# Altium PCB MotherBoard.PcbDoc
Units mil, origin at the board's own origin, x right, y up, seen from the top; angles counter-clockwise.
Board outline 6770.74 x 6458.91 mil, 2 copper layers (Top Layer, Bottom Layer); 79 components, 106 nets, 563 pads, 0 vias.
Unrouted connection lines stored in the file: 301.
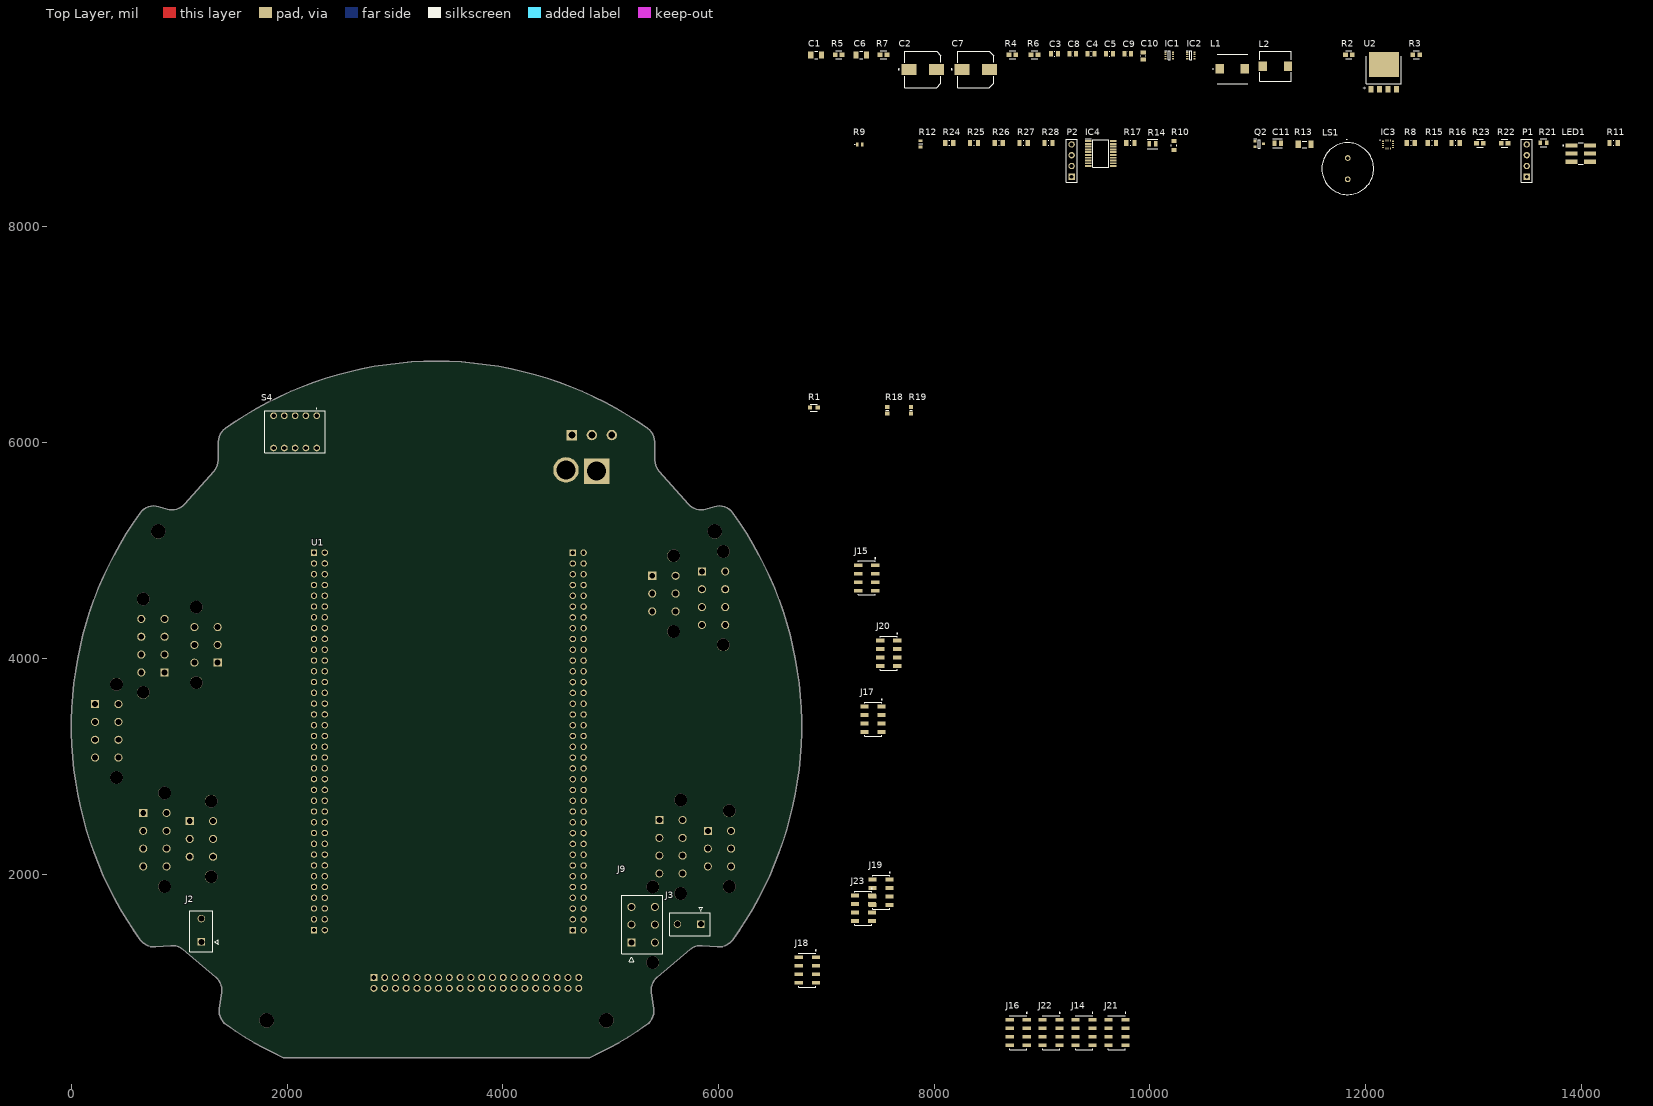
[diagram p0: Top Layer view]
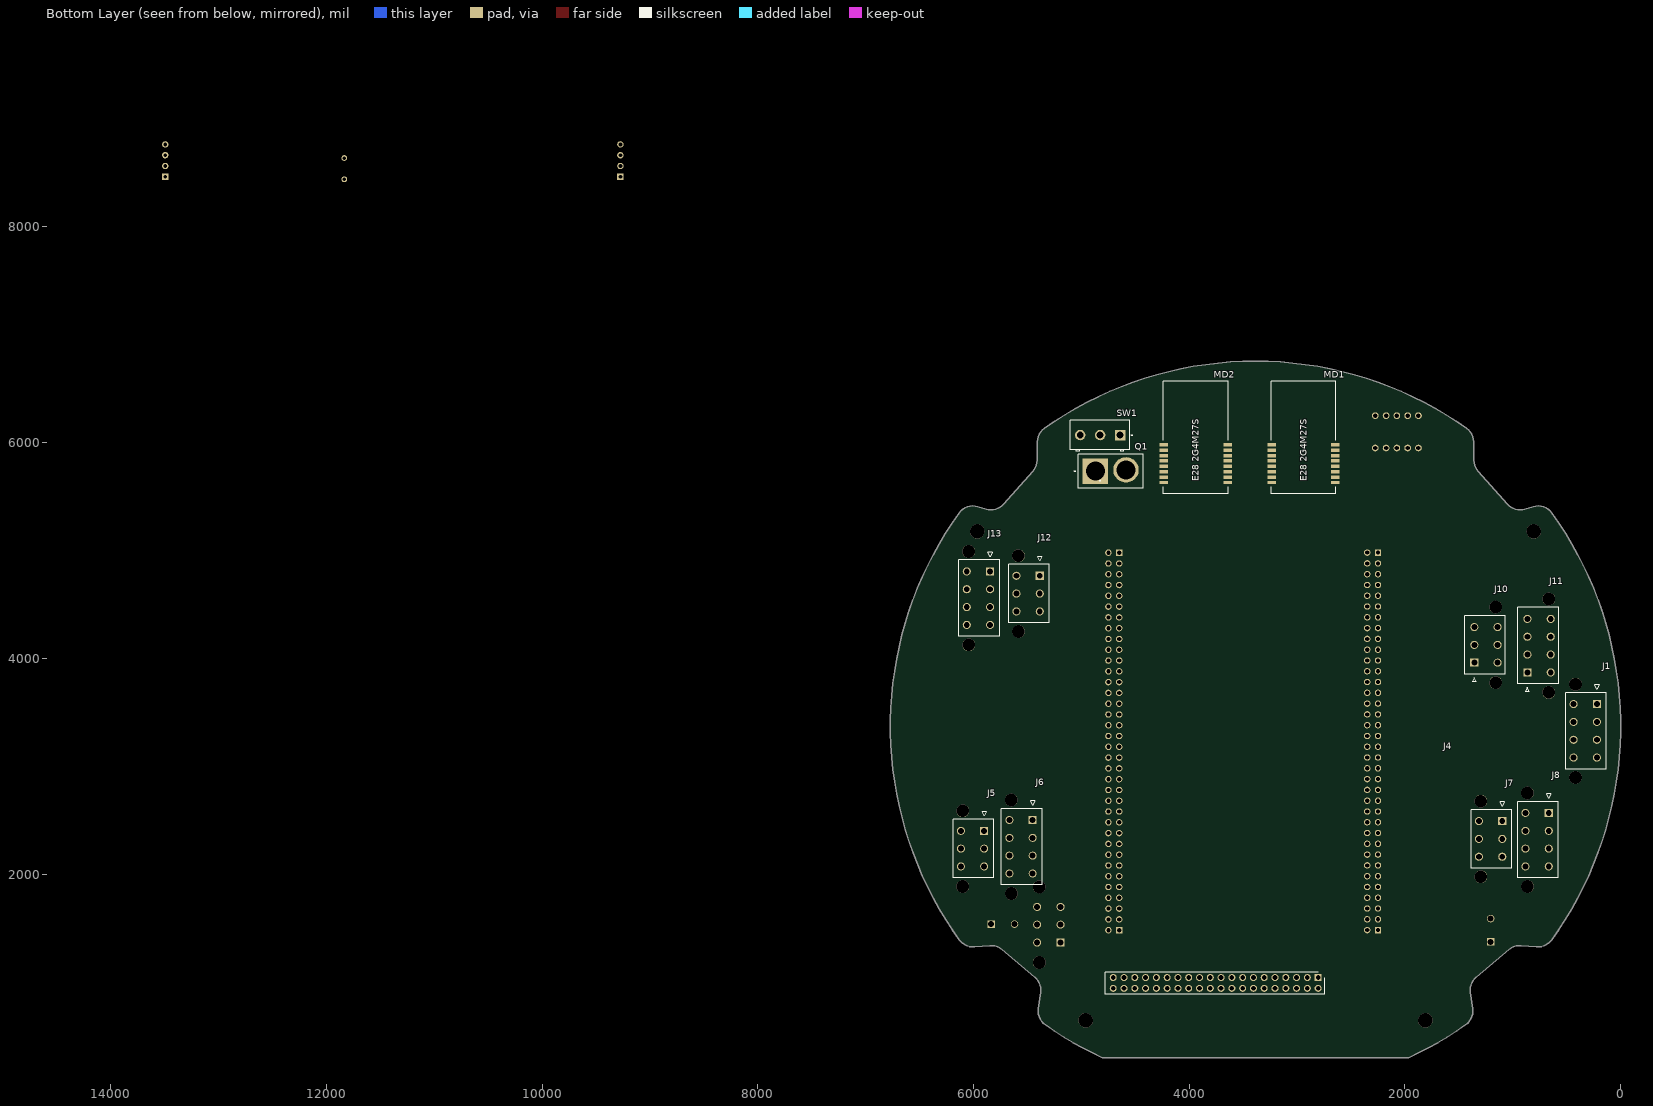
[diagram p1: Bottom Layer view, seen from below]

## Layer stack, top to bottom
Top Solder: solder mask 0.4, Solder Resist, Dk 3.5
Top Layer: signal copper 1.4
Dielectric 1: dielectric 12.6, FR-4, Dk 4.8
Bottom Layer: signal copper 1.4
Bottom Solder: solder mask 0.4, Solder Resist, Dk 3.5

## Board outline
6132.01,1389.53 6197.27,1483.31 6259.33,1579.25 6318.11,1677.22 6373.56,1777.12 6425.6,1878.83 6474.19,1982.25 6519.25,2087.24 6560.75,2193.7 6598.63,2301.49 6632.85,2410.5 6663.38,2520.6 6690.17,2631.67 6713.2,2743.58 6732.44,2856.21 6747.87,2969.42 6759.47,3083.08 6767.23,3197.07 6771.14,3311.26 6771.2,3425.52 6767.4,3539.71 6759.74,3653.71 6748.25,3767.39 6732.93,3880.61 6713.79,3993.26 6690.87,4105.19 6664.18,4216.28 6633.76,4326.42 6599.64,4435.46 6561.86,4543.29 6520.47,4649.78 6475.5,4754.82 6427.02,4858.28 6375.07,4960.04 6319.72,5059.99 6261.03,5158.02 6199.06,5254.02 6133.89,5347.86 6118.2,5366.45 6099.84,5382.4 6079.23,5395.33 6056.88,5404.93 6033.32,5410.98 6009.11,5413.32 5984.83,5411.91 5961.05,5406.78 5882.99,5383.49 5861.24,5378.64 5839.02,5376.92 5816.79,5378.34 5794.97,5382.89 5774.02,5390.48 5754.35,5400.95 5736.35,5414.08 5720.38,5429.63 5451.46,5731.45 5437.75,5749.25 5426.71,5768.83 5418.56,5789.77 5413.49,5811.66 5411.57,5834.05 5409.21,6006.66 5406.94,6031.22 5400.86,6055.13 5391.12,6077.8 5377.97,6098.66 5361.71,6117.22 5342.76,6133.01 5247.04,6198.38 5149.13,6260.43 5049.16,6319.09 4947.24,6374.3 4843.49,6425.98 4738.03,6474.09 4630.99,6518.55 4522.49,6559.33 4412.65,6596.37 4301.61,6629.62 4189.5,6659.06 4076.45,6684.64 3962.59,6706.34 3848.05,6724.13 3732.97,6737.98 3617.48,6747.89 3501.72,6753.84 3385.83,6755.83 3269.93,6753.84 3154.17,6747.89 3038.68,6737.98 2923.6,6724.13 2809.07,6706.34 2695.2,6684.64 2582.15,6659.06 2470.04,6629.62 2359,6596.37 2249.16,6559.33 2140.66,6518.55 2033.62,6474.09 1928.16,6425.98 1824.41,6374.3 1722.49,6319.09 1622.52,6260.43 1524.61,6198.38 1428.89,6133.01 1409.94,6117.22 1393.69,6098.66 1380.53,6077.8 1370.79,6055.13 1364.72,6031.22 1362.45,6006.66 1360.08,5834.05 1358.17,5811.66 1353.09,5789.77 1344.94,5768.83 1333.9,5749.25 1320.19,5731.45 1051.27,5429.63 1035.3,5414.08 1017.31,5400.94 997.63,5390.48 976.68,5382.89 954.87,5378.34 932.63,5376.92 910.41,5378.64 888.66,5383.49 810.6,5406.78 786.82,5411.91 762.54,5413.32 738.33,5410.98 714.77,5404.93 692.42,5395.33 671.82,5382.4 653.45,5366.45 637.76,5347.86 572.59,5254.02 510.62,5158.02 451.93,5059.99 396.58,4960.04 344.63,4858.28 296.15,4754.82 251.18,4649.78 209.79,4543.29 172.01,4435.46 137.89,4326.42 107.47,4216.28 80.78,4105.19 57.86,3993.26 38.72,3880.61 23.4,3767.39 11.91,3653.71 4.26,3539.71 0.45,3425.52 0.51,3311.26 4.42,3197.07 12.18,3083.08 23.78,2969.42 39.21,2856.21 58.45,2743.58 81.48,2631.67 108.27,2520.6 138.8,2410.5 173.02,2301.49 210.9,2193.69 252.4,2087.24 297.47,1982.25 346.05,1878.83 398.09,1777.12 453.54,1677.22 512.32,1579.24 574.38,1483.31 639.64,1389.53 654.53,1371.79 671.85,1356.43 691.25,1343.78 712.29,1334.11 734.51,1327.63 757.45,1324.47 780.61,1324.72 919.87,1336.47 944.5,1336.61 968.86,1332.91 992.34,1325.46 1014.36,1314.45 1034.4,1300.13 1338.23,1044.91 1354.49,1029.11 1368.32,1011.15 1379.43,991.38 1387.58,970.23 1392.61,948.12 1394.41,925.52 1392.95,902.9 1372.11,751.13 1370.68,726.58 1373.08,702.11 1379.27,678.31 1389.08,655.76 1402.29,635.02 1418.56,616.58 1437.51,600.91 1521.42,543.73 1607.01,489.09 1694.19,437.05 1782.9,387.64 1873.05,340.92 1964.57,296.92 4807.09,296.92 4898.6,340.92 4988.75,387.64 5077.46,437.05 5164.65,489.09 5250.24,543.73 5334.15,600.91 5353.09,616.58 5369.36,635.02 5382.57,655.76 5392.39,678.31 5398.57,702.11 5400.98,726.58 5399.54,751.13 5378.7,902.9 5377.24,925.52 5379.04,948.12 5384.07,970.23 5392.23,991.38 5403.33,1011.15 5417.16,1029.11 5433.42,1044.91 5737.25,1300.13 5757.29,1314.45 5779.32,1325.46 5802.8,1332.91 5827.15,1336.61 5851.78,1336.47 5991.04,1324.72 6014.2,1324.47 6037.14,1327.63 6059.37,1334.11 6080.41,1343.78 6099.8,1356.43 6117.13,1371.79

## Design rules (kind name [scope] priority, off if disabled: settings)
Clearance [All] p1: gap=10 ignorepadtopadclearanceinfootprint=FALSE
PolygonConnect [All] p1: connectstyle=Relief reliefconductorwidth=10 reliefentries=4 polygonreliefangle="90 Angle" airgapwidth=10
RoutingVias [All] p1: holewidth=28 width=50 viastyle="Through Hole" minholewidth=28 minwidth=50 maxholewidth=28 maxwidth=50
SolderMaskExpansion [All] p1: expansion=4 istentingtop=FALSE
Width [All] p1: maxlimit=10 minlimit=10 preferedwidth=10
30 further rules are at their usual default settings.

## Classes and differential pairs
component class Raspberry: J4
component class PowerSupply: C1 C2 C3 C4 C5 C6 C7 C8 C9 C10 IC1 IC2 L1 L2 Q1 R2 R3 R4 R5 R6 R7 SW1 U2
component class Peripherals: C11 IC3 IC4 J2 J3 LED1 LS1 MD1 MD2 P1 P2 Q2 R8 R9 R10 R11 R12 R13 R14 R15 R16 R17 R21 R22 R23 R24 R25 R26 R27 R28 S4
component class Motor_Connectors: J5 J6 J7 J8 J9 J10 J11 J12 J13
component class Main: J1 R1 R18 R19 U1
component class ESC_Connectors: J14 J15 J16 J17 J18 J19 J20 J21 J22 J23

## Components (designator, comment, footprint, x,y, rotation, side; value= is the part's Value field where it differs from the comment)
C1 "GMK316AB7106KL-TR" FP-1206-L_3_2_0_2-W_1_6_0-IPC_C 6905,9595 r0 top
C2 "UWT1H101MNL1GS" FP-UWT1H101MNL1GS-MFG 7895,9460 r0 top
C3 "100nF" CAPC0805(2012)155_L 9115,9605 r0 top value=10uF
C4 "22uF" CAPC0805(2012)155_L 9455,9605 r0 top value=10uF
C5 "22uF" CAPC0805(2012)155_L 9625,9605 r0 top value=10uF
C6 "GMK316AB7106KL-TR" FP-1206-L_3_2_0_2-W_1_6_0-IPC_C 7325,9595 r0 top
C7 "UWT1H101MNL1GS" FP-UWT1H101MNL1GS-MFG 8385,9460 r0 top
C8 "100nF" CAPC0805(2012)155_L 9285,9605 r0 top value=10uF
C9 "10uF" CAPC0805(2012)155_L 9795,9605 r0 top
C10 "10uF" CAPC0805(2012)155_L 9940,9585 r90 top
C11 "C0805C104J8RACTU" FP-C0805C-DN-MFG 11185,8775 r0 top value="0.10 μF"
IC1 "TPS563300DRLR" SOTFL50P160X60-8N 10180,9590 r0 top
IC2 "TPS563300DRLR" SOTFL50P160X60-8N 10380,9590 r0 top
IC3 "LSM6DS3TR-C" LGA-14(2.5X3X0.86) 12210,8765 r0 top
IC4 "PCF8574APWR" SOP65P640X120-20N 9545,8680 r0 top
J1 "172447-0608" 172447-YY08 220.08,3575.35 r90 bottom
J2 "1724479602" 172447_94959697_02 1205,1370 r0 top
J3 "1724479602" 172447_94959697_02 5836.54,1535 r90 top
J4 "PRT-14017" RHDR40W64P254_2X20_5130X500X1375P 2805,1040 r0 bottom
J5 "172447-0606" 172447-YY06 5901.26,2400.35 r90 bottom
J6 "172447-0608" 172447-YY08 5451.61,2500.71 r90 bottom
J7 "172447-0606" 172447-YY06 1097.8,2490.71 r90 bottom
J8 "172447-0608" 172447-YY08 666.61,2565.71 r90 bottom
J9 "172447-0606" 172447-YY06 5193.46,1364.65 r270 top
J10 "172447-0606" 172447-YY06 1357.2,3959.29 r270 bottom
J11 "172447-0608" 172447-YY08 864.92,3869.29 r270 bottom
J12 "172447-0606" 172447-YY06 5386.26,4765.35 r90 bottom
J13 "172447-0608" 172447-YY08 5846.61,4805.71 r90 bottom
J14 "CLT-104-02-G-D-TR_1" CLT-104-02-G-D-TR 9390,530 r90 top
J15 "CLT-104-02-G-D-TR_1" CLT-104-02-G-D-TR 7375,4745 r90 top
J16 "CLT-104-02-G-D-TR_1" CLT-104-02-G-D-TR 8780,530 r90 top
J17 "CLT-104-02-G-D-TR_1" CLT-104-02-G-D-TR 7433.94,3435.63 r90 top
J18 "CLT-104-02-G-D-TR_1" CLT-104-02-G-D-TR 6823.94,1109.37 r90 top
J19 "CLT-104-02-G-D-TR_1" CLT-104-02-G-D-TR 7508.94,1830.63 r90 top
J20 "CLT-104-02-G-D-TR_1" CLT-104-02-G-D-TR 7578.94,4046.89 r90 top
J21 "CLT-104-02-G-D-TR_1" CLT-104-02-G-D-TR 9695,530 r90 top
J22 "CLT-104-02-G-D-TR_1" CLT-104-02-G-D-TR 9085,530 r90 top
J23 "CLT-104-02-G-D-TR_1" CLT-104-02-G-D-TR 7343.94,1681.89 r90 top
L1 "CLF7045T-4R7N-D" CLF7045-D 10765,9465 r0 top
L2 "CLF7045T-6R8N-D" FP-CLF7045-MFG 11165,9490 r0 top value=6.8uH
LED1 "150505M173300" 150505M173300 13995,8680 r0 top
LS1 "PS1240P02BT" PS1240P02BT 11835,8540 r0 top
MD1 "E28-2G4M27S" E28-2G4M27S 2940,5630 r0 bottom
MD2 "E28-2G4M27S" E28-2G4M27S 3940.28,5630 r0 bottom
P1 "Header Display OLED" HDR1X4 13495,8465 r90 top
P2 "Header 4" HDR1X4 9275,8465 r90 top
Q1 "XT60_YELLOW" AMASS_XT60PB-M 4728.27,5735 r180 bottom
Q2 "DTC143ZUBTL" SOTFL65P210X105-3N 11015,8770 r0 top
R1 "CPF0603F63K4C1" FP-CPF0603-MFG 6885,6325 r0 top value=63.4KΩ
R2 "RT0603BRE075KL" FP-CRCW0603-e3-IPC_A 11845,9595 r0 top
R3 "CRCW060310K0FKEA" FP-CRCW0603-e3-IPC_A 12470,9595 r0 top
R4 "CRCW060330K0FKTA" FP-CRCW0603-e3-IPC_A 8725,9595 r0 top
R5 "CRCW060310K0FKEA" FP-CRCW0603-e3-IPC_A 7115,9595 r0 top
R6 "CRCW060352K3FKEA" FP-CRCW0603-e3-IPC_A 8930,9595 r0 top
R7 "CRCW060310K0FKEA" FP-CRCW0603-e3-IPC_A 7530,9595 r0 top
R8 "CRCW08054K70JNEA" FP-CRCW0805-e3-IPC_B 12420,8780 r0 top
R9 "ERJ-UP3D4702V" ERJUP3 7310,8765 r0 top
R10 "AC0805JR-074K7L" FP-AC0805-MFG 10225,8755 r90 top value=4.7KΩ
R11 "CRCW08054K70JNEA" FP-CRCW0805-e3-IPC_B 14300,8780 r0 top
R12 "CR0603-FX-34R0ELF" FP-CR0603-MFG 7875,8770 r90 top
R13 "RC1206FR-071KL" RESC3116X65X40ML10T20 11435,8765 r0 top
R14 "CRGP0805F47K" FP-CRGP0805-IPC_C 10025,8770 r0 top value=47KΩ
R15 "CRCW08054K70JNEA" FP-CRCW0805-e3-IPC_B 12615,8780 r0 top
R16 "CRCW08054K70JNEA" FP-CRCW0805-e3-IPC_B 12835,8780 r0 top
R17 "CRCW08054K70JNEA" FP-CRCW0805-e3-IPC_B 9820,8780 r0 top
R18 "10K" RESC1608X55N 7565,6300 r90 top
R19 "CRG0603F100K" RESC1608X55N 7785,6300 r90 top
R21 "CRCW0603130RFKEA" FP-CRCW0603-e3-MFG 13650,8780 r0 top
R22 "CRCW060310R0FKEA" FP-CRCW0603-e3-IPC_A 13290,8775 r0 top
R23 "CRCW060310R0FKEA" FP-CRCW0603-e3-IPC_A 13060,8775 r0 top
R24 "CRCW08054K70JNEA" FP-CRCW0805-e3-IPC_B 8140,8780 r0 top
R25 "CRCW08054K70JNEA" FP-CRCW0805-e3-IPC_B 8370,8780 r0 top
R26 "CRCW08054K70JNEA" FP-CRCW0805-e3-IPC_B 8600,8780 r0 top
R27 "CRCW08054K70JNEA" FP-CRCW0805-e3-IPC_B 8830,8780 r0 top
R28 "CRCW08054K70JNEA" FP-CRCW0805-e3-IPC_B 9060,8780 r0 top
S4 "A6FR-5101" A6FR5101 2275,6250 r180 top
SW1 "CS12ANW03" FP-CS12ANW03-MFG 4826.65,6070 r0 bottom
U1 "NUCLEOH723ZG" NEW_NUCLEO 3500,3604.8 r0 top
U2 "SQJQ141EL-T1_GE3" PowerPAK_8x8L_BWL-2_VIS 12170,9455 r0 top

## Footprints (in the part's own frame and the unit in brackets; to place one, negate y for a bottom-side part, rotate by r counter-clockwise, add the part's x,y. Pads: shape width x height; smd on the part's side, far side on the other; paste and mask are expansions set on the pad)
150505M173300 [mm]
  rect 2.8x1 smd: 1(-2.2,1.9) 2(2.2,1.9) 3(-2.2,0) 4(2.2,0) 5(-2.2,-1.9) 6(2.2,-1.9)
  silkscreen extent -4.2,-2.5 0.6,2.5, body extent -2.7,-2.5 2.7,2.5, height 1.6
172447-YY06 [mm]
  rect 1.9x1.9 hole 1.4: 1(0,0)
  round 1.9 hole 1.4: 2(-4.2,0) 3(-8.4,0) 4(0,5.5) 5(-4.2,5.5) 6(-8.4,5.5)
  round 3 hole 3 unplated: 7(4.7,5.04) 8(-13.1,5.04)
  silkscreen extent -11.1,-2.25 4.5,7.35, body extent -14.49,-2.28 6.09,8.72, height 12.8
172447-YY08 [mm]
  rect 1.9x1.9 hole 1.4: 1(0,0)
  round 1.9 hole 1.4: 2(-4.2,0) 3(-8.4,0) 4(-12.6,0) 5(0,5.5) 6(-4.2,5.5) 7(-8.4,5.5) 8(-12.6,5.5)
  round 3 hole 3 unplated: 9(4.7,5.04) 10(-17.3,5.04)
  silkscreen extent -15.3,-2.25 4.5,7.35, body extent -18.69,-2.25 6.09,8.75, height 12.75
172447_94959697_02 [mm]
  rect 1.75x1.75 hole 1.4: 1(0,0)
  round 1.75 hole 1.4: 2(0,5.5)
  silkscreen extent -2.7,-2.25 4,7.35, body extent -3.09,-3.27 3.11,7.73, height 2.02
A6FR5101 [mm]
  round 1.575 hole 1.05: 1(0,0) 2(2.54,0) 3(5.08,0) 4(7.62,0) 5(10.16,0) 6(10.16,7.62) 7(7.62,7.62) 8(5.08,7.62) 9(2.54,7.62) 10(0,7.62)
  silkscreen extent -2.05,-1.75 12.21,8.76, body extent -2.05,-1.14 12.21,8.76, height 10.4
AMASS_XT60PB-M [mm]
  rect 6x6 / inner round 6 / far side rect 6x6 hole 4.5: 1(-3.6,0)
  round 6 hole 4.5: 2(3.6,0.305)
  silkscreen extent -8.55,-4 7.7,4, body extent -7.75,-4.05 7.75,4.05, height 16
CAPC0805(2012)155_L [mm] "Chip Capacitor, Body 2.0x1.2mm, Height 1.55mm, IPC High Density"
  rect 0.95x1.35 smd: 1(-0.8,0) 2(0.8,0)
  silkscreen extent -0.05,-0.58 0.05,0.58, body extent -1.1,-0.72 1.1,0.72, height 1.55
CLF7045-D [mm]
  rect 2x2.2 smd: 1(-2.95,0) 2(2.95,0)
  silkscreen extent -4.6,-3.45 3.6,3.45, body extent -3.6,-3.45 3.6,3.45, height 4.5
CLT-104-02-G-D-TR [mm]
  rect 0.89x1.91 smd: 01(3,-2.005) 02(3,2.005) 03(1,-2.005) 04(1,2.005) 05(-1,-2.005) 06(-1,2.005) 07(-3,-2.005) 08(-3,2.005)
  silkscreen extent -4,-2.1 4.75,2, body extent -4,-2.58 4,2.58, height 2.27
E28-2G4M27S [mm] "E28-2G4M27S Module"
  rect 2x0.8 smd: 1(-7.5,0) 2(-7.5,-1.27) 3(-7.5,-2.54) 4(-7.5,-3.81) 5(-7.5,-5.08) 6(-7.5,-6.35) 7(-7.5,-7.62) 8(-7.5,-8.89) 9(7.5,-8.89) 10(7.5,-7.62) 11(7.5,-6.35) 12(7.5,-5.08) 13(7.5,-3.81) 14(7.5,-2.54) 15(7.5,-1.27) 16(7.5,0)
  silkscreen extent -7.62,-23.81 7.62,2.69, body extent -7.5,-23.81 7.5,2.69, height 2.81
ERJUP3 [mm]
  rect 0.65x0.9 smd: 1(-0.575,0) 2(0.575,0)
  silkscreen extent -1.22,-0.05 -1.12,0.05, body extent -0.8,-0.4 0.8,0.4, height 0.55
FP-1206-L_3_2_0_2-W_1_6_0-IPC_C [mil]
  rect 47.42x67.17 smd paste+0 mask+0: 1(-49.25,0) 2(49.25,0)
  silkscreen extent -14,-35 14,35, body extent -77,-39 77,39, height 10
FP-AC0805-MFG [mm]
  rect 0.9x1.2 smd paste+0 mask+0: 1(-1.05,0) 2(1.05,0)
  silkscreen extent -0.23,-0.67 0.23,0.67, body extent -1.6,-0.77 1.6,0.77, height 0.25
FP-C0805C-DN-MFG [mm]
  rect 0.95x1.35 smd paste+0 mask+0: 1(-0.75,0) 2(0.75,0)
  silkscreen extent -1.1,-1.07 1.1,1.07, body extent -1.4,-0.85 1.4,0.85, height 0.25
FP-CLF7045-MFG [mm]
  rect 2x2.2 smd paste+0 mask+0: 1(-2.95,0) 2(2.95,0)
  silkscreen extent -3.7,-3.55 3.7,3.55, body extent -4.05,-3.65 4.05,3.65, height 0.25
FP-CPF0603-MFG [mm]
  rect 1x0.9 smd paste+0 mask+0: 1(-0.9,0) 2(0.9,0)
  silkscreen extent -0.82,-0.82 0.82,0.82, body extent -1.5,-0.55 1.5,0.55, height 0.25
FP-CR0603-MFG [mm]
  rect 0.65x0.9 smd paste+0 mask+0: 1(-0.725,0) 2(0.725,0)
  silkscreen extent 0,-0.45 0,0.45, body extent -1.15,-0.55 1.15,0.55, height 0.25
FP-CRCW0603-e3-IPC_A [mil]
  rect 44.69x41.82 smd paste+0 mask+0: 1(-32.1,0) 2(32.1,0)
  silkscreen extent -30,-37 30,37, body extent -74,-41 74,41, height 10
FP-CRCW0603-e3-MFG [mm]
  rect 0.75x1 smd paste+0 mask+0: 1(-0.75,0) 2(0.75,0)
  silkscreen extent -0.8,-0.9 0.8,0.9, body extent -1.22,-0.6 1.22,0.6, height 0.25
FP-CRCW0805-e3-IPC_B [mil]
  rect 39.63x55.44 smd paste+0 mask+0: 1(-37.44,0) 2(37.44,0)
  silkscreen extent -3,-25 3,25, body extent -67,-38 67,38, height 10
FP-CRGP0805-IPC_C [mil]
  rect 35.67x51.57 smd paste+0 mask+0: 1(-30.55,0) 2(30.55,0)
  silkscreen extent -48,-43 48,43, body extent -52,-31 52,31, height 10
FP-CS12ANW03-MFG [mm]
  rect 2.45x2.45 hole 1.6 paste-2539.97 mask+0: 1(-4.7,0)
  round 2.45 hole 1.6 paste-2539.97 mask+0: 2(0,0) 3(4.7,0)
  silkscreen extent -7.62,-3.5 7,3.8, body extent -7,-3.66 7,3.66, height 13.61
FP-UWT1H101MNL1GS-MFG [mm]
  rect 3.5x2.5 smd paste+0 mask+0: 1(-3.25,0) 2(3.25,0)
  silkscreen extent -5.77,-4.25 4.25,4.25, body extent -5.25,-4.5 5.25,4.5, height 0.25
HDR1X4 [mm] "Connector; Header; 4 Position"
  rect 1.5x1.5 hole 0.9: 1(0,0)
  round 1.5 hole 0.9: 2(2.54,0) 3(5.08,0) 4(7.62,0)
  silkscreen extent -1.27,-1.27 8.89,1.27
LGA-14(2.5X3X0.86) [mm]
  rect 0.475x0.25 smd: 1(-1.162,0.75) 2(-1.162,0.25) 3(-1.162,-0.25) 4(-1.162,-0.75) 8(1.162,-0.75) 9(1.162,-0.25) 10(1.162,0.25) 11(1.162,0.75)
  rect 0.25x0.475 smd: 5(-0.5,-0.913) 6(0,-0.913) 7(0.5,-0.913) 12(0.5,0.913) 13(0,0.913) 14(-0.5,0.913)
  silkscreen extent -1.93,0.95 -1.88,1.01, body extent -1.5,-1.25 1.5,1.25, height 0.86
NEW_NUCLEO [mm]
  rect 1.508x1.508 / inner round 1.508 / far side rect 1.508x1.508 hole 1: CN11_1(-31.75,34.93) CN12_1(29.21,34.91) CN15_1(29.21,-53.99) CN16_1(-31.75,-53.97)
  round 1.508 hole 1: CN11_2(-29.21,34.93) CN11_3(-31.75,32.39) CN11_4(-29.21,32.39) CN11_5(-31.75,29.85) CN11_6(-29.21,29.85) CN11_7(-31.75,27.31) CN11_8(-29.21,27.31) CN11_9(-31.75,24.77) CN11_10(-29.21,24.77) CN11_11(-31.75,22.23) CN11_12(-29.21,22.23) CN11_13(-31.75,19.69) CN11_14(-29.21,19.69) CN11_15(-31.75,17.15) CN11_16(-29.21,17.15) CN11_17(-31.75,14.61) CN11_18(-29.21,14.61) CN11_19(-31.75,12.07) CN11_20(-29.21,12.07) CN11_21(-31.75,9.53) CN11_22(-29.21,9.53) CN11_23(-31.75,6.99) CN11_24(-29.21,6.99) CN11_25(-31.75,4.45) CN11_26(-29.21,4.45) CN11_27(-31.75,1.91) CN11_28(-29.21,1.91) CN11_29(-31.75,-0.63) CN11_30(-29.21,-0.63) CN11_31(-31.75,-3.17) CN11_32(-29.21,-3.17) CN11_33(-31.75,-5.71) CN11_34(-29.21,-5.71) CN11_35(-31.75,-8.25) CN11_36(-29.21,-8.25) CN11_37(-31.75,-10.79) CN11_38(-29.21,-10.79) CN11_39(-31.75,-13.33) CN11_40(-29.21,-13.33) CN11_41(-31.75,-15.87) CN11_42(-29.21,-15.87) CN11_43(-31.75,-18.41) CN11_44(-29.21,-18.41) CN11_45(-31.75,-20.95) CN11_46(-29.21,-20.95) CN11_47(-31.75,-23.49) CN11_48(-29.21,-23.49) CN11_49(-31.75,-26.03) CN11_50(-29.21,-26.03) CN11_51(-31.75,-28.57) CN11_52(-29.21,-28.57) CN11_53(-31.75,-31.11) CN11_54(-29.21,-31.11) CN11_55(-31.75,-33.65) CN11_56(-29.21,-33.65) CN11_57(-31.75,-36.19) CN11_58(-29.21,-36.19) CN11_59(-31.75,-38.73) CN11_60(-29.21,-38.73) CN11_61(-31.75,-41.27) CN11_62(-29.21,-41.27) CN11_63(-31.75,-43.81) CN11_64(-29.21,-43.81) CN11_65(-31.75,-46.35) CN11_66(-29.21,-46.35) CN11_67(-31.75,-48.89) CN11_68(-29.21,-48.89) CN11_69(-31.75,-51.43) CN11_70(-29.21,-51.43) CN12_2(31.75,34.91) CN12_3(29.21,32.37) CN12_4(31.75,32.37) CN12_5(29.21,29.83) CN12_6(31.75,29.83) CN12_7(29.21,27.29) CN12_8(31.75,27.29) CN12_9(29.21,24.75) CN12_10(31.75,24.75) CN12_11(29.21,22.21) CN12_12(31.75,22.21) CN12_13(29.21,19.67) CN12_14(31.75,19.67) CN12_15(29.21,17.13) CN12_16(31.75,17.13) CN12_17(29.21,14.59) CN12_18(31.75,14.59) CN12_19(29.21,12.05) CN12_20(31.75,12.05) CN12_21(29.21,9.51) CN12_22(31.75,9.51) CN12_23(29.21,6.97) CN12_24(31.75,6.97) CN12_25(29.21,4.43) CN12_26(31.75,4.43) CN12_27(29.21,1.89) CN12_28(31.75,1.89) CN12_29(29.21,-0.65) CN12_30(31.75,-0.65) CN12_31(29.21,-3.19) CN12_32(31.75,-3.19) CN12_33(29.21,-5.73) CN12_34(31.75,-5.73) CN12_35(29.21,-8.27) CN12_36(31.75,-8.27) CN12_37(29.21,-10.81) CN12_38(31.75,-10.81) CN12_39(29.21,-13.35) CN12_40(31.75,-13.35) CN12_41(29.21,-15.89) CN12_42(31.75,-15.89) CN12_43(29.21,-18.43) CN12_44(31.75,-18.43) CN12_45(29.21,-20.97) CN12_46(31.75,-20.97) CN12_47(29.21,-23.51) CN12_48(31.75,-23.51) CN12_49(29.21,-26.05) CN12_50(31.75,-26.05) CN12_51(29.21,-28.59) CN12_52(31.75,-28.59) CN12_53(29.21,-31.13) CN12_54(31.75,-31.13) CN12_55(29.21,-33.67) CN12_56(31.75,-33.67) CN12_57(29.21,-36.21) CN12_58(31.75,-36.21) CN12_59(29.21,-38.75) CN12_60(31.75,-38.75) CN12_61(29.21,-41.29) CN12_62(31.75,-41.29) CN12_63(29.21,-43.83) CN12_64(31.75,-43.83) CN12_65(29.21,-46.37) CN12_66(31.75,-46.37) CN12_67(29.21,-48.91) CN12_68(31.75,-48.91) CN12_69(29.21,-51.45) CN12_70(31.75,-51.45) CN15_2(31.75,-53.99) CN16_2(-29.21,-53.97)
PowerPAK_8x8L_BWL-2_VIS [mil]
  rect 44.97x57.56 smd paste+0 mask+0: 1(-118.11,-179.5) 2(-39.37,-179.5) 3(39.37,-179.5) 4(118.11,-179.5)
  rect 279x230 smd paste+0 mask+0: 5(0,51.5)
  silkscreen extent -162,-130 162,130, body extent -157,-194 157,153, height 67
PS1240P02BT [mm]
  round 1.35 hole 0.85: 1(0,2.5) 2(0,-2.5)
  silkscreen extent -6.1,-6.1 6.1,6.91, body extent -6.1,-6.06 6.1,6.12, height 7.11
RESC1608X55N [mm]
  rect 0.9x1 smd: 1(-0.8,0) 2(0.8,0)
  silkscreen extent 0,-0.33 0,0.33, body extent -0.8,-0.43 0.8,0.43, height 0.55
RESC3116X65X40ML10T20 [mm] "Chip Resistor, 2-Leads, Body 3.10x1.60mm, IPC Low Density"
  rect 1.25x1.8 smd: 1(-1.525,0) 2(1.525,0)
  silkscreen extent -0.5,-0.8 0.5,0.8, body extent -1.6,-0.85 1.6,0.85, height 0.65
RHDR40W64P254_2X20_5130X500X1375P [mm]
  rect 1.65x1.65 hole 1.1: 1(0,0)
  round 1.65 hole 1.1: 2(0,2.54) 3(2.54,0) 4(2.54,2.54) 5(5.08,0) 6(5.08,2.54) 7(7.62,0) 8(7.62,2.54) 9(10.16,0) 10(10.16,2.54) 11(12.7,0) 12(12.7,2.54) 13(15.24,0) 14(15.24,2.54) 15(17.78,0) 16(17.78,2.54) 17(20.32,0) 18(20.32,2.54) 19(22.86,0) 20(22.86,2.54) 21(25.4,0) 22(25.4,2.54) 23(27.94,0) 24(27.94,2.54) 25(30.48,0) 26(30.48,2.54) 27(33.02,0) 28(33.02,2.54) 29(35.56,0) 30(35.56,2.54) 31(38.1,0) 32(38.1,2.54) 33(40.64,0) 34(40.64,2.54) 35(43.18,0) 36(43.18,2.54) 37(45.72,0) 38(45.72,2.54) 39(48.26,0) 40(48.26,2.54)
  silkscreen extent -1.52,-1.23 50.08,3.92, body extent -32.26,-53.05 56.55,4.95, height 19.4
SOP65P640X120-20N [mm]
  rect 1.475x0.45 smd: 1(-2.938,2.925) 2(-2.938,2.275) 3(-2.938,1.625) 4(-2.938,0.975) 5(-2.938,0.325) 6(-2.938,-0.325) 7(-2.938,-0.975) 8(-2.938,-1.625) 9(-2.938,-2.275) 10(-2.938,-2.925) 11(2.938,-2.925) 12(2.938,-2.275) 13(2.938,-1.625) 14(2.938,-0.975) 15(2.938,-0.325) 16(2.938,0.325) 17(2.938,0.975) 18(2.938,1.625) 19(2.938,2.275) 20(2.938,2.925)
  silkscreen extent -3.67,-3.25 1.85,3.5, body extent -3.2,-3.25 3.2,3.25, height 1.13
SOTFL50P160X60-8N [mm]
  rect 0.475x0.3 smd: 1(-0.838,0.75) 2(-0.838,0.25) 3(-0.838,-0.25) 4(-0.838,-0.75) 5(0.838,-0.75) 6(0.838,-0.25) 7(0.838,0.25) 8(0.838,0.75)
  silkscreen extent -1.07,-1.05 0.25,1.15, body extent -0.8,-1.05 0.8,1.05, height 0.6
SOTFL65P210X105-3N [mm]
  rect 0.695x0.54 smd: 1(-0.972,0.65) 2(-0.972,-0.65) 3(0.972,0)
  silkscreen extent -1.32,-1 0.28,1.17, body extent -1.05,-1 1.05,1, height 1.05

## Part data
C1 C6: library part CMP-2000-06324-3, "None", Capacitance=10uF, Case Code (Imperial)=1206, Case Code (Metric)=3216, Dielectric=X7R, Max Operating Temperature=125°C, Min Operating Temperature=-55°C, Package Quantity=2000, Resistor Type=Ceramic, Tolerance=10%, Voltage Rating=35V, Case/Package=1206, Height=1.6mm, Length=0.126inch, Mount="Surface Mount", Packaging="Tape and Reel", REACH SVHC="No SVHC", RoHS Compliant=Yes, Series=M, Termination=SMD/SMT, Thickness=0.071inch, Voltage Rating (DC)=35V, Width=1.6mm
C2 C7: library part CMP-2000-07373-2, "CAP ALUM 100UF 20% 50V SMD", Capacitance=100uF, Case/Package=Radial, Dielectric Material=Aluminium, Leakage Current=3uA, Max Operating Temperature=105°C, Min Operating Temperature=-55°C, Package Quantity=500, Ripple Current=140mA, Tolerance=20%, Voltage=50V, Construction=Cylindrical, Diameter=8mm, Dissipation Factor=0.14%, Height=10mm, Height - Seated (Max)=0.413inch, Lead Free="Lead Free", Length=10mm, Life (Hours)=1000Hour, Mount="Surface Mount", Number of Pins=2, Packaging="Tape and Reel", Radiation Hardening=No, REACH SVHC="No SVHC", Ripple Current (AC)=140mA, RoHS Compliant=Yes, Series=WT, Termination=SMD/SMT, Voltage Rating=50V, Voltage Rating (DC)=50V
C3 C4 C5 C8 C9 C10: library part CMP-1036-04916-1, "CAP 10uF 6.3V ±10% 0805 (2012 Metric) Thickness 1.55mm SMD", Case-EIA=0805, Case-Metric=2012, Rated Voltage="6.3 V", Tolerance=Â±10%, Max Thickness="1.55 mm", Technology=SMT
C11: library part CMP-03020-032188-1, "CAP CER 0.1UF 10V 5% X7R 0805", Capacitance="0.10 μF", Manufacturer=KEMET, Package=C0805C-DN, Temperature="-55°C to +125°C", Temperature Characteristic=X7R, Temperature Coefficient=30ppm/°C, Temperature Range High=+125°C, Temperature Range Low=-55°C, Tolerance=0.05, Voltage Rating="10 V", Automotive=No, Category=Cap, ComponentLink2Description=Datasheet, ComponentLink2URL=https://content.kemet.com/datasheets/KEM_C1003_C0G_SMD.pdf, Device Class L1="Passive Components", Device Class L2=Capacitors, Device Class L3="Ceramic Capacitors", Digikey Description="CAP CER 0.1UF 10V 5% X7R 0805", Height=0.88mm, Ipc Land Pattern Name=CAPC200125X78, Lead Free=Yes, Manufacturer Part Number=C0805C104J8RACTU, Material=Ceramic, Mouser Description="Multilayer Ceramic Capacitors MLCC - SMD/SMT 10volts 0.1uF X7R 5%", Octopart=https://octopart.com/c0805c104j8ractu-kemet-11807087, RoHS=TRUE
IC1 IC2: "Integrated Circuit", Manufacturer_Name="Texas Instruments", Mouser Part Number=595-TPS563300DRLR, Datasheet Link=https://www.ti.com/lit/ds/symlink/tps563300.pdf?ts=1666035990155&ref_url=https%253A%252F%252Fwww.ti.com%252Fproduct%252FTPS563300, Height=0.6mm, Manufacturer_Part_Number=TPS563300DRLR, Mouser Price/Stock=https://www.mouser.co.uk/ProductDetail/Texas-Instruments/TPS563300DRLR?qs=vvQtp7zwQdMDxJAw0dSlAg%3D%3D
IC3: "Integrated Circuit", Manufacturer_Name=STMicroelectronics, Mouser Part Number=511-LSM6DS3TR-C, Arrow Part Number=LSM6DS3TR-C, Arrow Price/Stock=https://www.arrow.com/en/products/lsm6ds3tr-c/stmicroelectronics?region=nac, Datasheet Link=http://www.st.com/resource/en/datasheet/lsm6ds3tr-c.pdf, Manufacturer_Part_Number=LSM6DS3TR-C, Mouser Price/Stock=https://www.mouser.co.uk/ProductDetail/STMicroelectronics/LSM6DS3TR-C?qs=u4fy%2FsgLU9NHwPlhP3LTBw%3D%3D
IC4: "Integrated Circuit", Manufacturer_Name="Texas Instruments", Mouser Part Number=595-PCF8574APWR, Arrow Part Number=PCF8574APWR, Arrow Price/Stock=https://www.arrow.com/en/products/pcf8574apwr/texas-instruments?region=nac, Datasheet Link=http://www.ti.com/lit/ds/symlink/pcf8574a.pdf, Height=1.2mm, Manufacturer_Part_Number=PCF8574APWR, Mouser Price/Stock=https://www.mouser.co.uk/ProductDetail/Texas-Instruments/PCF8574APWR?qs=bkMXpVdiF42gbWVI8U3xeA%3D%3D
J1 J6 J8 J11 J13: "Connector Mate 46992-0840", Manufacturer_Name=Molex, Mouser Part Number=538-172447-0608, Datasheet Link=https://www.molex.com/pdm_docs/sd/1724470406_sd.pdf, Height=12.8mm, Manufacturer_Part_Number=172447-0608, Mouser Price/Stock=https://www.mouser.co.uk/ProductDetail/Molex/172447-0608?qs=t7xnP681wgUaroQMnMhOkA%3D%3D
J2 J3: "Connector Mate 46992-0240", Manufacturer_Name=Molex, Datasheet Link=https://www.molex.com/pdm_docs/sd/1724470402_sd.pdf, Height=12.8mm, Manufacturer_Part_Number=1724479602
J4: "Connector", Manufacturer_Name=SparkFun, Mouser Part Number=474-PRT-14017, Arrow Part Number=PRT-14017, Arrow Price/Stock=https://www.arrow.com/en/products/prt-14017/sparkfun-electronics?region=nac, Datasheet Link=https://componentsearchengine.com/Datasheets/1/PRT-14017.pdf, Height=13.75mm, Manufacturer_Part_Number=PRT-14017, Mouser Price/Stock=https://www.mouser.co.uk/ProductDetail/SparkFun/PRT-14017?qs=a4BXICGgSn%2F%252BaML822b65A%3D%3D
J5 J7 J9 J10 J12: "Connector", Manufacturer_Name=Molex, Mouser Part Number=538-172447-0606, Datasheet Link=https://www.molex.com/pdm_docs/sd/1724470406_sd.pdf, Height=12.8mm, Manufacturer_Part_Number=172447-0606, Mouser Price/Stock=https://www.mouser.co.uk/ProductDetail/Molex/172447-0606?qs=t7xnP681wgUnuNdnB4N%252Bbw%3D%3D
J14 J15 J16 J17 J18 J19 J20 J21 J22 J23: "8 Position Receptacle Connector 0.079 (2.00mm) Surface Mount Gold", Package=None, Check_prices=https://www.snapeda.com/parts/CLT-104-02-G-D-TR/Samtec/view-part/?ref=eda, MF=Samtec, MP=CLT-104-02-G-D-TR, SnapEDA_Link=https://www.snapeda.com/parts/CLT-104-02-G-D-TR/Samtec/view-part/?ref=snap
L1: "Inductor", Manufacturer_Name=TDK, Mouser Part Number=810-CLF7045T-4R7N-D, Arrow Part Number=CLF7045T-4R7N-D, Arrow Price/Stock=https://www.arrow.com/en/products/clf7045t-4r7n-d/tdk, Datasheet Link=https://product.tdk.com/system/files/dam/doc/product/inductor/inductor/smd/wdcatalog/withdrawn_inductor_commercial_power_clf7045_en.pdf, Height=4.8mm, Manufacturer_Part_Number=CLF7045T-4R7N-D, Mouser Price/Stock=https://www.mouser.co.uk/ProductDetail/TDK/CLF7045T-4R7N-D?qs=ilIqL0%2F%2FoDU8gjMEHwFGUQ%3D%3D
L2: library part CMP-08253-000023-1, "FIXED IND 6.8UH 3A 27 MOHM SMD", Inductance=6.8uH, Manufacturer=TDK, Package=CLF7045, Rms Current=3A, Series Resistance=35.1mΩ, Temperature="-40°C to +150°C", Temperature Range High=+150°C, Temperature Range Low=-40°C, Test Frequency=100kHz, Tolerance=30%, Automotive=Yes, Automotive Grade="Grade 0", Category=Ind, ComponentLink2Description=Datasheet, ComponentLink2URL=https://product.tdk.com/en/search/inductor/inductor/smd/info/print_pdf, Composition=Wirewound, Core Material=Ferrite, Device Class L1="Passive Components", Device Class L2=Inductors, Device Class L3="Fixed Inductors", Digikey Description="FIXED IND 6.8UH 3A 27 MOHM SMD", Height=4.8mm, Lead Free=Yes, Manufacturer Part Number=CLF7045T-6R8N-D, Mouser Description="Inductor Power Shielded Wirewound 6.8uH 30% 100KHz Ferrite 3A 35.1mOhm DCR Automotive T/R", Octopart=https://octopart.com/clf7045t-6r8n-d-tdk-27590387, RoHS=TRUE, Shielding=true
LED1: "LED", Manufacturer_Name="Wurth Elektronik", Mouser Part Number=710-150505M173300, Datasheet Link=https://katalog.we-online.de/led/datasheet/150505M173300.pdf, Height=1.8mm, Manufacturer_Part_Number=150505M173300, Mouser Price/Stock=https://www.mouser.co.uk/ProductDetail/Wurth-Elektronik/150505M173300?qs=fAHHVMwC%252Bbi%2FURn4Qu0%2FAA%3D%3D
LS1: "Loudspeaker or Buzzer", Manufacturer_Name=TDK, Mouser Part Number=810-PS1240P02BT, Arrow Part Number=PS1240P02BT, Arrow Price/Stock=https://www.arrow.com/en/products/ps1240p02bt/tdk?region=nac, Datasheet Link=https://product.tdk.com/system/files/dam/doc/product/sw_piezo/sw_piezo/piezo-buzzer/catalog/piezoelectronic_buzzer_ps_en.pdf, Manufacturer_Part_Number=PS1240P02BT, Mouser Price/Stock=https://www.mouser.co.uk/ProductDetail/TDK/PS1240P02BT?qs=d7g9p1yFhWaZXSY9MjKMkw%3D%3D
MD1 MD2: "E28-2G4M27S Ebyte SX1280 Module"
P1: library part "Header 4", "Header, 4-Pin", LatestRevisionDate=17-Jul-2002, LatestRevisionNote="Re-released for DXP Platform.", Publisher="Altium Limited"
P2: "Header, 4-Pin", LatestRevisionDate=17-Jul-2002, LatestRevisionNote="Re-released for DXP Platform.", Publisher="Altium Limited"
Q1: "Power connector; 65A; PIN: 2; Colour: yellow", Package=None, Availability="Not in stock", Check_prices=https://www.snapeda.com/parts/XT60%20YELLOW/Pololu/view-part/?ref=eda, MF=Pololu, MP="XT60 YELLOW", Price=None, SnapEDA_Link=https://www.snapeda.com/parts/XT60%20YELLOW/Pololu/view-part/?ref=snap
Q2: "Transistor BJT NPN", Manufacturer_Name="ROHM Semiconductor", Mouser Part Number=755-DTC143ZUBTL, Datasheet Link=https://componentsearchengine.com/Datasheets/2/DTC143ZUBTL.pdf, Height=1.05mm, Manufacturer_Part_Number=DTC143ZUBTL, Mouser Price/Stock=https://www.mouser.co.uk/ProductDetail/ROHM-Semiconductor/DTC143ZUBTL?qs=IsRgwgmxh6%2Ffuj9yCN7zBQ%3D%3D
R1: library part CMP-03211-001472-1, "RES SMD 63.4KΩ 1% 1/16W 0603", Manufacturer="TE Connectivity", Package=CPF0603, Power Rating=0.063W, Resistance=63.4KΩ, Temperature="-55°C to +155°C", Temperature Coefficient=50ppm/°C, Temperature Range High=+155°C, Temperature Range Low=-55°C, Tolerance=1%, Voltage Rating=50V, Automotive=No, Category=Res, ComponentLink2Description=Datasheet, ComponentLink2URL=https://www.te.com/commerce/DocumentDelivery/DDEController?Action=showdoc&DocId=Data+Sheet%7F1773200%7FM%7Fpdf%7FEnglish%7FENG_DS_1773200_M.pdf%7F3-1676481-2, Composition="Thin Film", Device Class L1="Passive Components", Device Class L2=Resistors, Device Class L3="Chip SMD Resistors", Height=0.55mm, Ipc Land Pattern Name=RESC15580X45, Lead Free=Yes, Manufacturer Part Number=CPF0603F63K4C1, Octopart=https://octopart.com/cpf0603f63k4c1-te+connectivity-7515022, octopart_url=https://octopart.com/cpf0603f63k4c1-te+connectivity-7515022, Packaging="1k Reel", RoHS=TRUE, Series=CPF
R2 R3 R4 R5 R6 R7 R22 R23: library part CMP-2000-03845-2, "RES Thick Film, 10Ω, 1%, 0.1W, 100ppm/°C, 0603", Case Code (Imperial)=0603, Case Code (Metric)=1608, Max Operating Temperature=155°C, Max Power Dissipation=100mW, Min Operating Temperature=-55°C, Package Quantity=10, Resistance=10R, Temperature Coefficient=100ppm/°C, Tolerance=1%, Voltage Rating=75V, Case/Package=0603, Composition="Thick Film", Contact Plating=Tin, Depth=0.85mm, Features="Automotive AEC-Q200", Height=0.45mm, Lead Free="Lead Free", Length=1.55mm, Military Standard=Not, Mount="Surface Mount", Number of Pins=2, Number of Terminations=2, Packaging="Tape and Reel", Power Rating=100mW, Termination=SMD/SMT, Voltage Rating (DC)=75V, Weight=7.1E-05oz, Width=0.033inch
R8 R11 R15 R16 R17 R24 R25 R26 R27 R28: library part CMP-2001-03967-2, "RES Thick Film, 4.7kΩ, 5%, 0.125W, 200ppm/°C, 0805", Case Code (Imperial)=0805, Case Code (Metric)=2012, Max Operating Temperature=155°C, Min Operating Temperature=-55°C, Package Quantity=5000, Power Rating=125mW, Resistance=4.7kR, Temperature Coefficient=200ppm/°C, Tolerance=5%, Voltage Rating=150V, Case/Package=0805, Composition="Thick Film", Contact Plating=Tin, Depth=1.25mm, Height=0.45mm, Length=2mm, Military Standard=Not, Mount="Surface Mount", Packaging="Tape and Reel", Radiation Hardening=No, Termination=SMD/SMT, Weight=0.000194oz, Width=1.25mm
R9: "Resistor", Manufacturer_Name=Panasonic, Mouser Part Number=667-ERJ-UP3D4702V, Datasheet Link=https://industrial.panasonic.com/cdbs/www-data/pdf/RDP0000/AOA0000C337.pdf, Height=0.55mm, Manufacturer_Part_Number=ERJ-UP3D4702V, Mouser Price/Stock=https://www.mouser.co.uk/ProductDetail/Panasonic/ERJ-UP3D4702V?qs=GedFDFLaBXG9rkg%252BckNv2g%3D%3D
R10: library part CMP-2001-04476-2, "RES SMD 4.7K OHM 5% 1/8W 0805", Manufacturer=Yageo, Package=AC0805, Power Rating=1/8W, Resistance=4.7KΩ, Temperature="-55°C to +155°C", Temperature Range High=+155°C, Temperature Range Low=-55°C, Tolerance=0.05, Voltage Rating=150V, Automotive=Yes, Automotive Grade="Grade 0", Category=Res, ComponentLink2Description=Datasheet, ComponentLink2URL=http://www.yageo.com/documents/recent/PYu-AC_51_RoHS_L_6.pdf, Composition="Thick Film", Device Class L1="Passive Components", Device Class L2=Resistors, Device Class L3="Chip SMD Resistors", Digikey Description="RES SMD 4.7K OHM 5% 1/8W 0805", Footprint Url=http://www.yageo.com/exep/pages/download/literatures/PYu-R_Mount_10.pdf, Height=0.6mm, Ipc Land Pattern Name=RESC200125X50, Lead Free=Yes, Manufacturer Part Number=AC0805JR-074K7L, Mouser Description="Thick Film Resistors - SMD 1/8W 4.7K ohm 5% AEC-Q200", Octopart=https://octopart.com/ac0805jr-074k7l-yageo-26638632, RoHS=TRUE, Series=AC
R12: library part CMP-1012-00343-2, "Thick Film Chip Resistors 0603 34Ω 0.1W 1% 100ppm/°C", Case Code (Imperial)=0603, Case Code (Metric)=1608, Max Operating Temperature=155°C, Min Operating Temperature=-55°C, Power Rating=100mW, Resistance=34R, Temperature Coefficient=100ppm/°C, Tolerance=1%, Voltage Rating=50V, Case/Package=0603, Composition="Thick Film", Contact Plating=Tin, Depth=0.8mm, Height=0.45mm, Length=1.6mm, Military Standard=Not, Mount="Surface Mount", Packaging="Tape and Reel", Radiation Hardening=No, Termination=SMD/SMT, Thickness=457um, Weight=7.1E-05oz, Width=0.8mm
R13: library part CMP-2100-03678-1, "Chip Resistor, 1 KOhm, +/- 1%, 0.25 W, -55 to 155 degC, 1206 (3216 Metric), RoHS, Tape and Reel", Case Code (Imperial)=1206, Case Code (Metric)=3216, Manufacturer=Yageo, Max Operating Temperature=155degC, Min Operating Temperature=-55degC, Package Description="2-Pin Surface Mount Device, Body 3.1 x 1.6 mm", Package Reference=1206.0, Power Rating=250mW, Resistance=1KOhm, Temperature Coefficient=100ppm/degreesC, Tolerance=1%, Voltage Rating=200V, Case/Package=1206, Composition=ThickFilm, Datasheet URL=http://www.yageo.com/NewPortal/yageodocoutput?fileName=/pdf/R-Chip/PYu-RC_Group_51_RoHS_L_5.pdf, Datasheet Version="Rev. 5, 10/2016", Depth=1.6mm, Height=0.55mm, Lead Free=LeadFree, Length=3.1mm, Manufacturer URL=http://www.yageo.com/, Military Standard=Not, Packaging=TapeandReel, REACH SVHC=Unknown, RoHSCompliant=true, Termination=SMD/SMT
R14: library part CMP-03211-006358-1, "CRGP0805 47KΩ 0.33W ±100ppm/°C 1% 150V", Ambient Temperature Range High=+70°C, Manufacturer=TE, Package=CRGP0805, Power Rating=0.33W, Resistance=47KΩ, Temperature="-55°C to +155°C", Temperature Coefficient=±100ppm/°C, Temperature Range High=+155°C, Temperature Range Low=-55°C, Tolerance=0.01, Voltage Rating=150V, Automotive=No, Category=Res, ComponentLink2Description=Datasheet, ComponentLink2URL=https://www.mouser.com/datasheet/2/418/NG_DS_9-1773463-9_A-1358566.pdf, Composition="Thick Film", Device Class L1="Passive Components", Device Class L2=Resistors, Device Class L3="Chip SMD Resistors", Height=0.65mm, Ipc Land Pattern Name=RESC200125X55, Lead Free=Yes, Manufacturer Part Number=CRGP0805F47K, Octopart=https://octopart.com/crgp0805f47k-te+connectivity-91018823, RoHS=TRUE, Series=CRGP
R18: library part ERJ-U3RD1002V, "Resistor", Manufacturer_Name=Panasonic, Mouser Part Number=667-ERJ-U3RD1002V, Arrow Part Number=ERJ-U3RD1002V, Arrow Price/Stock=https://www.arrow.com/en/products/erj-u3rd1002v/panasonic?region=nac, Datasheet Link=https://industrial.panasonic.com/cdbs/www-data/pdf/RDP0000/RDP0000C343.pdf, Height=0.55mm, Manufacturer_Part_Number=ERJ-U3RD1002V, Mouser Price/Stock=https://www.mouser.co.uk/ProductDetail/Panasonic/ERJ-U3RD1002V?qs=TiOZkKH1s2Rg0qUjKdWcPw%3D%3D
R19: "Resistor", Manufacturer_Name="TE Connectivity", Mouser Part Number=279-CRG0603F100K, Arrow Part Number=CRG0603F100K, Arrow Price/Stock=https://www.arrow.com/en/products/crg0603f100k/te-connectivity?region=nac, Datasheet Link=http://docs-europe.electrocomponents.com/webdocs/13d1/0900766b813d116f.pdf, Height=0.55mm, Manufacturer_Part_Number=CRG0603F100K, Mouser Price/Stock=https://www.mouser.co.uk/ProductDetail/TE-Connectivity-Holsworthy/CRG0603F100K?qs=VHcS2MTj4gaG9fI5w0o7FA%3D%3D
R21: library part CMP-2000-03889-2, "RES Thick Film, 130Ω, 1%, 0.1W, 100ppm/°C, 0603", Case Code (Imperial)=0603, Case Code (Metric)=1608, Max Operating Temperature=155°C, Max Power Dissipation=100mW, Min Operating Temperature=-55°C, Package Quantity=10, Resistance=130R, Temperature Coefficient=100ppm/°C, Tolerance=1%, Voltage Rating=75V, Case/Package=0603, Composition="Thick Film", Contact Plating=Tin, Depth=0.85mm, Features="Automotive AEC-Q200", Height=0.45mm, Lead Free="Lead Free", Length=1.55mm, Military Standard=Not, Number of Pins=2, Number of Terminations=2, Packaging="Tape and Reel", Power Rating=100mW, Radiation Hardening=No, Termination=SMD/SMT, Voltage Rating (DC)=75V, Weight=7.1E-05oz, Width=0.85mm, Working Voltage=75V
S4: "Switch", Manufacturer_Name="Omron Electronics", Mouser Part Number=653-A6FR-5101, Arrow Part Number=A6FR-5101, Arrow Price/Stock=https://www.arrow.com/en/products/a6fr5101/omron?region=nac, Datasheet Link=https://www.mouser.com/datasheet/2/307/omron_03202018_A6FR_datasheet-1314011.pdf, Height=10.3mm, Manufacturer_Part_Number=A6FR-5101, Mouser Price/Stock=https://www.mouser.co.uk/ProductDetail/Omron-Electronics/A6FR-5101?qs=fAHHVMwC%252BbhmGWTU7%252Bb5wg%3D%3D
SW1: library part CMP-31746-000002-1, "SWITCH SLIDE SPDT 3A 125V", Contact Current Rating=3A, Flammability Rating="UL94 V-0", Max Operating Temperature=85°C, Max Voltage Rating (AC)=250V, Min Operating Temperature=-30°C, Package Quantity=1, Voltage Rating (AC)=125V, Actuator Length=5.1mm, Actuator Material=Nylon, Actuator Type=Standard, Contact Material=Copper, Contact Plating=Silver, Contact Style=Non-Shorting, Current Rating=3A, Depth=7.5mm, Electrical Life=20000Cycles, Illumination Type=Non-Illuminated, Lead Free="Lead Free", Length=14mm, Max Current Rating=3A, Mechanical Life=50000Cycles, Mount="Through Hole", Orientation=Vertical, Packaging=Tray, Primary Type=SWITCH, Reach SVHC Compliant=Yes, RoHS Compliant=Yes, Series=CS, Switch Function=On-On, Switch Travel=2.2mm, Termination="PC Pin", Throw Configuration=SPDT
U1: "STM32H723ZG Nucleo-144 STM32H7 STM32 MCU 32-Bit Embedded Evaluation Board", Package=None, Availability="In Stock", Check_prices=https://www.snapeda.com/parts/NUCLEOH723ZG/STMicroelectronics/view-part/?ref=eda, MF=STMicroelectronics, MP=NUCLEOH723ZG, Price=None, Purchase-URL=https://pricing.snapeda.com/search/part/NUCLEOH723ZG/?ref=eda, SnapEDA_Link=https://www.snapeda.com/parts/NUCLEOH723ZG/STMicroelectronics/view-part/?ref=snap
U2: "No Description Available", Mfr_Name=Vishay, Copyright="Copyright (C) 2023 Ultra Librarian. All rights reserved.", Manufacturer_Part_Number=SQJQ141EL-T1_GE3, RefDes=RefDes, Type=DEV

## Free pads (board coordinates)
  round 133.86 hole 133.86: 1(805.82,5176.54) 1(1811.02,642.36) 1(4960.63,642.36) 1(5965.83,5176.54)

## Nets (pads, with @x,y where several pads share a name; then routed paths per layer and width w, separated by ;. In a path a pad name is that pad's centre, name@x,y a point inside that pad or via, vN(x,y) a via of type N, cw(c..) or ccw(c..) an arc to the next point about the centre after c; other vN are vias at no path point)
3V3: C4.2 C5.2 C11.1 IC3.5 IC3.8 IC3.12 IC4.5 L1.2 LS1.2 MD1.1 MD1.8 MD2.1 MD2.9 P1.2 P2.2 R8.2 R9.1 R11.1 R12.1 R13.1 R15.1 R16.2 R17.2 R19.1 S4.6 S4.7 S4.8 S4.9 S4.10 U1.CN11_16
5V: C9.2 C10.2 J4.38 J4.40 J6.1 J8.1 J11.1 J13.1 L2.2
BAT_REF: R1.2 R18.1 U1.CN12_34
GND: C1.2 C2.1 C4.1 C5.1 C6.2 C7.1 C9.1 C10.1 C11.2 IC1.4 IC2.4 IC3.1 IC3.2 IC3.3 IC3.6 IC3.7 IC4.6 IC4.7 IC4.9 IC4.15 J1.7 J1.8 J2.1 J3.1 J4.1 J4.8 J4.12 J4.28 J4.31 J6.5 J8.5 J11.5 J13.5 J14.05 J14.07 J15.05 J15.07 J18.05 J18.07 J20.05 J20.07 J21.05 J21.07 LED1.1 LED1.3 LED1.5 MD1.2 MD1.7 MD1.9 MD1.10 MD1.16 MD2.2 MD2.7 MD2.8 MD2.10 MD2.16 P1.1 P2.1 Q1.1 Q2.2 R1.1 R5.1 R7.1 R14.1 R24.1 R25.1 R26.1 R27.1 R28.1 SW1.1 U1.CN11_8 U1.CN11_19 U1.CN11_20 U1.CN11_22 U1.CN11_49 U1.CN11_60 U1.CN12_9 U1.CN12_20 U1.CN12_32 U1.CN12_39 U1.CN12_54 U1.CN12_63
KICK_CHARGE: J1.6 U1.CN12_42
KICK_CHIP: J1.2 U1.CN12_36
KICK_DONE: J1.5 R19.2 U1.CN12_53
KICK_LOW: J1.1 U1.CN12_58
NetC3_1: C3.1 IC1.5 L1.1 R4.2
NetC3_2: C3.2 IC1.6
NetC8_1: C8.1 IC2.5 L2.1 R6.2
NetC8_2: C8.2 IC2.6
NetIC1_8: IC1.8 R4.1 R5.2
NetIC2_8: IC2.8 R6.1 R7.2
NetIC3_4: IC3.4 U1.CN12_5
NetIC3_13: IC3.13 R16.1 U1.CN12_17
NetIC3_14: IC3.14 R15.2 U1.CN11_21
NetIC4_1: IC4.1 R17.1 U1.CN12_2
NetIC4_2: IC4.2 U1.CN12_23
NetIC4_4: IC4.4 U1.CN12_1
NetIC4_10: IC4.10 IC4.11 IC4.12 IC4.14 IC4.16 R24.2 R25.2 R26.2 R27.2 R28.2 S4.1 S4.2 S4.3 S4.4 S4.5
NetJ2_2: J2.2 R9.2 U1.CN11_54
NetJ3_2: J3.2 R12.2
NetJ4_32: J4.32 U1.CN11_2
NetJ4_34: J4.34 U1.CN11_1
NetJ5_1: J5.1 J5.4 J16.06 J16.08
NetJ5_2: J5.2 J5.3 J14.02 J14.04
NetJ5_5: J5.5 J5.6 J14.06 J14.08
NetJ6_2: J6.2 J16.05
NetJ6_3: J6.3 J16.03
NetJ6_4: J6.4 J16.01
NetJ6_6: J6.6 U1.CN12_41
NetJ6_7: J6.7 U1.CN12_43
NetJ7_1: J7.1 J7.4 J17.06 J17.08
NetJ7_2: J7.2 J7.3 J15.02 J15.04
NetJ7_5: J7.5 J7.6 J15.06 J15.08
NetJ8_2: J8.2 J17.05
NetJ8_3: J8.3 J17.03
NetJ8_4: J8.4 J17.01
NetJ8_6: J8.6 U1.CN11_70
NetJ8_7: J8.7 U1.CN11_65
NetJ9_1: J9.1 J9.4 J19.06 J19.08
NetJ9_2: J9.2 J9.3 J18.02 J18.04
NetJ9_5: J9.5 J9.6 J18.06 J18.08
NetJ10_1: J10.1 J10.4 J22.06 J22.08
NetJ10_2: J10.2 J10.3 J21.02 J21.04
NetJ10_5: J10.5 J10.6 J21.06 J21.08
NetJ11_2: J11.2 J22.05
NetJ11_3: J11.3 J22.03
NetJ11_4: J11.4 J22.01
NetJ11_6: J11.6 U1.CN11_30
NetJ11_7: J11.7 U1.CN11_28
NetJ12_1: J12.1 J12.4 J23.06 J23.08
NetJ12_2: J12.2 J12.3 J20.02 J20.04
NetJ12_5: J12.5 J12.6 J20.06 J20.08
NetJ13_2: J13.2 J23.05
NetJ13_3: J13.3 J23.03
NetJ13_4: J13.4 J23.01
NetJ13_6: J13.6 U1.CN12_15
NetJ13_7: J13.7 U1.CN12_13
NetJ16_02: J16.02 U1.CN11_9
NetJ16_04: J16.04 U1.CN11_11
NetJ16_07: J16.07 U1.CN12_52
NetJ17_02: J17.02 U1.CN11_41
NetJ17_04: J17.04 U1.CN11_43
NetJ17_07: J17.07 U1.CN12_47
NetJ19_02: J19.02 U1.CN12_4
NetJ19_04: J19.04 U1.CN12_19
NetJ19_07: J19.07 U1.CN12_3
NetJ22_02: J22.02 U1.CN12_48
NetJ22_04: J22.04 U1.CN12_46
NetJ22_07: J22.07 U1.CN12_56
NetJ23_02: J23.02 U1.CN11_47
NetJ23_04: J23.04 U1.CN11_46
NetJ23_07: J23.07 U1.CN11_50
NetLED1_2: LED1.2 R21.1
NetLED1_4: LED1.4 R22.1
NetLED1_6: LED1.6 R23.1
NetLS1: Q2.3 R13.2
NetMD1_3: MD1.3 U1.CN11_35
NetMD1_4: MD1.4 U1.CN11_37
NetMD1_5: MD1.5 U1.CN11_40
NetMD1_6: MD1.6 U1.CN12_16
NetMD1_11: MD1.11 U1.CN11_17
NetMD1_12: MD1.12 U1.CN11_4
NetMD1_13: MD1.13 U1.CN12_59
NetMD2_3: MD2.3 U1.CN11_63
NetMD2_4: MD2.4 U1.CN12_29
NetMD2_5: MD2.5 U1.CN12_11
NetMD2_6: MD2.6 U1.CN11_32
NetMD2_11: MD2.11 U1.CN12_22
NetMD2_12: MD2.12 U1.CN12_27
NetMD2_13: MD2.13 U1.CN12_24
NetP1_3: P1.3 R11.2 U1.CN11_51
NetP1_4: P1.4 R8.1 U1.CN11_53
NetP2_3: P2.3 U1.CN12_60
NetP2_4: P2.4 U1.CN12_50
NetQ1_2: Q1.2 R2.2 U2.2 U2.3 U2.4
NetQ2_1: Q2.1 R10.2 R14.2
NetR2_1: R2.1 R3.1 U2.1
NetR3_2: R3.2 SW1.2
NetR10_1: R10.1 U1.CN12_37
NetR21_2: R21.2 U1.CN11_42
NetR22_2: R22.2 U1.CN11_59
NetR23_2: R23.2 U1.CN11_58
VBAT: C1.1 C2.2 C6.1 C7.2 IC1.3 IC2.3 J1.3 J1.4 J14.01 J14.03 J15.01 J15.03 J18.01 J18.03 J20.01 J20.03 J21.01 J21.03 R18.2 U2.5
pads on no net: IC1.1 IC1.2 IC1.7 IC2.1 IC2.2 IC2.7 IC3.9 IC3.10 IC3.11 IC4.3 IC4.8 IC4.13 IC4.17 IC4.18 IC4.19 IC4.20 J1.9 J1.10 J4.2 J4.3 J4.4 J4.5 J4.6 J4.7 J4.9 J4.10 J4.11 J4.13 J4.14 J4.15 J4.16 J4.17 J4.18 J4.19 J4.20 J4.21 J4.22 J4.23 J4.24 J4.25 J4.26 J4.27 J4.29 J4.30 J4.33 J4.35 J4.36 J4.37 J4.39 J5.7 J5.8 J6.8 J6.9 J6.10 J7.7 J7.8 J8.8 J8.9 J8.10 J9.7 J9.8 J10.7 J10.8 J11.8 J11.9 J11.10 J12.7 J12.8 J13.8 J13.9 J13.10 J19.01 J19.03 J19.05 LS1.1 MD1.14 MD1.15 MD2.14 MD2.15 SW1.3 U1.CN11_3 U1.CN11_5 U1.CN11_6 U1.CN11_7 U1.CN11_10 U1.CN11_12 U1.CN11_13 U1.CN11_14 U1.CN11_15 U1.CN11_18 U1.CN11_23 U1.CN11_24 U1.CN11_25 U1.CN11_26 U1.CN11_27 U1.CN11_29 U1.CN11_31 U1.CN11_33 U1.CN11_34 U1.CN11_36 U1.CN11_38 U1.CN11_39 U1.CN11_44 U1.CN11_45 U1.CN11_48 U1.CN11_52 U1.CN11_55 U1.CN11_56 U1.CN11_57 U1.CN11_61 U1.CN11_62 U1.CN11_64 U1.CN11_66 U1.CN11_67 U1.CN11_68 U1.CN11_69 U1.CN12_6 U1.CN12_7 U1.CN12_8 U1.CN12_10 U1.CN12_12 U1.CN12_14 U1.CN12_18 U1.CN12_21 U1.CN12_25 U1.CN12_26 U1.CN12_28 U1.CN12_30 U1.CN12_31 U1.CN12_33 U1.CN12_35 U1.CN12_38 U1.CN12_40 U1.CN12_44 U1.CN12_45 U1.CN12_49 U1.CN12_51 U1.CN12_55 U1.CN12_57 U1.CN12_61 U1.CN12_62 U1.CN12_64 U1.CN12_65 U1.CN12_66 U1.CN12_67 U1.CN12_68 U1.CN12_69 U1.CN12_70 U1.CN15_1 U1.CN15_2 U1.CN16_1 U1.CN16_2

## Text inside footprints (layer, text, board x,y; h text height)
MD1: Bottom Overlay "E28 2G4M27S" at 2910.63,5640 h60 r270
MD2: Bottom Overlay "E28 2G4M27S" at 3910.91,5640 h60 r270
U2: Top 3D Body "*" at 12039.39,9315.5 h50; Top Overlay "*" at 11975.02,9250.5 h50